# Altium PCB Power.PcbDoc (part 2 of 2)
Units mm, origin at the board's own origin, x right, y up, seen from the top; angles counter-clockwise.
Board outline 25.5 x 25.5 mm, 6 copper layers (1 Top (Sig/Pwr), 2 (GND), 3 (Sig/Pwr), 4 (GND/Sig), 5 (GND), 6 Bottom (Sig/Pwr)), stack 1.74 mm thick; 75 components, 42 nets, 252 pads, 4 vias.
Unrouted connection lines stored in the file: 215.
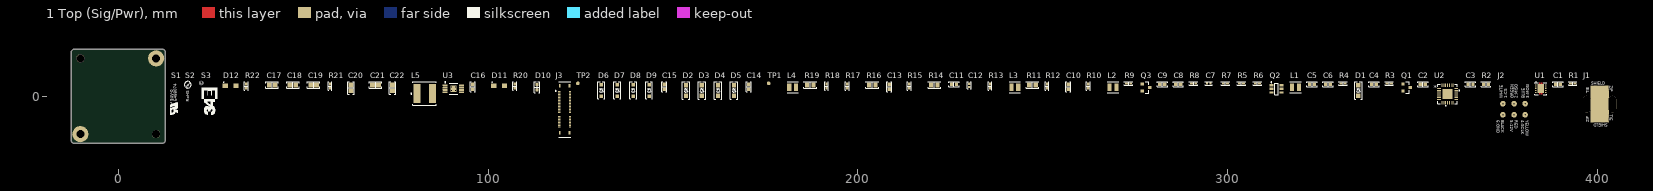
[diagram p0: 1 Top (Sig/Pwr) view]

## Polygon pours and split planes (outlines as drawn) (continued)
GND on 5 (GND) (split plane): 11.858,12.224 11.961,12.188 12.053,12.13 12.13,12.053 12.188,11.961 12.224,11.858 12.24,11.721 12.24,-11.721 12.224,-11.858 12.188,-11.961 12.13,-12.053 12.053,-12.13 11.961,-12.188 11.858,-12.224 11.721,-12.24 -11.721,-12.24 -11.858,-12.224 -11.961,-12.188 -12.053,-12.13 -12.13,-12.053 -12.188,-11.961 -12.224,-11.858 -12.24,-11.721 -12.24,11.721 -12.224,11.858 -12.188,11.961 -12.13,12.053 -12.053,12.13 -11.961,12.188 -11.858,12.224 -11.721,12.24 11.721,12.24

## Text inside footprints (layer, text, board x,y; h text height)
J1: Top Overlay "TIE" at 403.414,-5.029 h0.8 r270; Top Overlay "ZIP" at 403.414,2.812 h0.8 r270; Top Overlay "TIE" at 397.854,0.812 h0.8 r90; Top Overlay "ZIP" at 397.854,-7.028 h0.8 r90; Top Overlay "SHIELD" at 398.435,3.172 h0.8; Top Overlay "SHIELD" at 402.833,-7.388 h0.8 r180
J2: Top Overlay "BLUE / 3:MOSI" at 381.551,-0.505 h0.8 r90; Top Overlay "RED / 5:12V" at 376.439,-6.505 h0.8 r270; Top Overlay "YELLOW / 4:SCLK" at 379.439,-6.505 h0.8 r270; Top Overlay "GREEN / 2:MISO" at 378.551,-0.505 h0.8 r90; Top Overlay "WHITE / 1:CS" at 375.617,-0.505 h0.8 r90; Top Overlay "BLACK / 6:GND" at 372.863,-6.505 h0.8 r270
S1: Top Overlay "E488074" at 15.866,-1.368 h0.8 r90; Top Overlay "94V-0" at 14.906,-1.368 h0.8 r90
S2: Top Overlay "RoHS Pb" at 19.196,-1.497 h0.8 r90
S3: Top Overlay "©" at 23.478,2.745 h2 r90
U2: Top Overlay "*" at 355.752,1.725 h1.27; Mechanical 13 "*" at 357.353,1.725 h1.27